# Altium PCB 606-100835.pcbdoc (part 1 of 3)
Units mm, origin at the board's own origin, x right, y up, seen from the top; angles counter-clockwise.
Board outline 27 x 28.35 mm, 6 copper layers (Layer 1, Layer 2, Layer 3, Layer 4, Layer 5, Layer 6), stack 1.518 mm thick; 145 components, 197 nets, 755 pads, 438 vias.
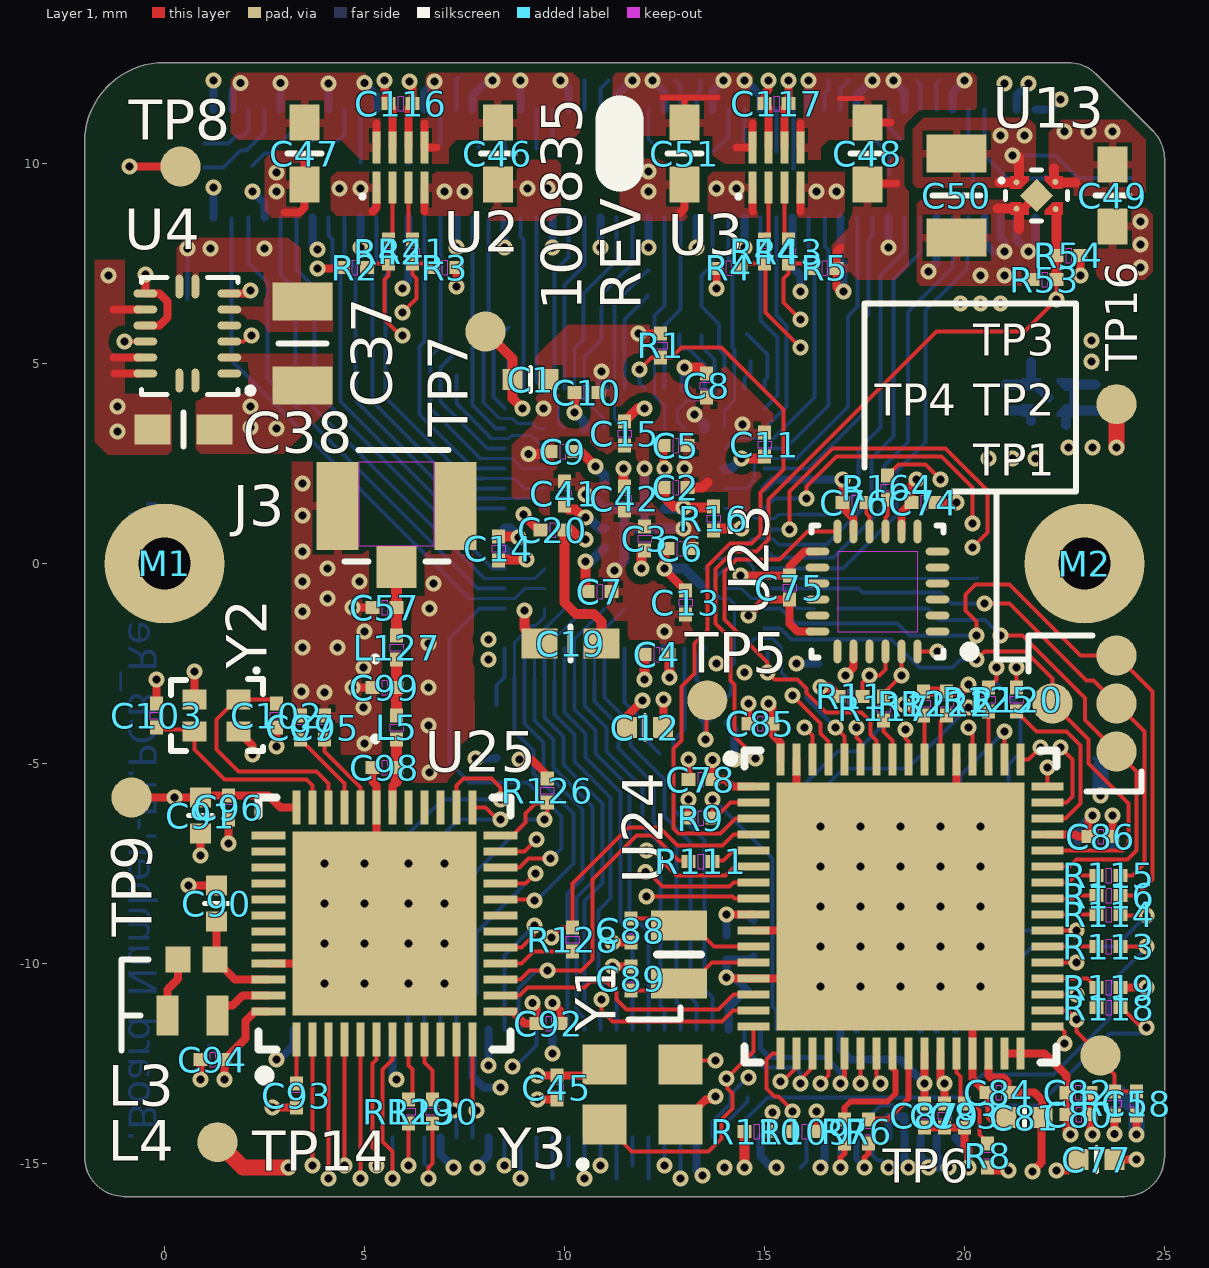
[diagram p0: Layer 1 view]
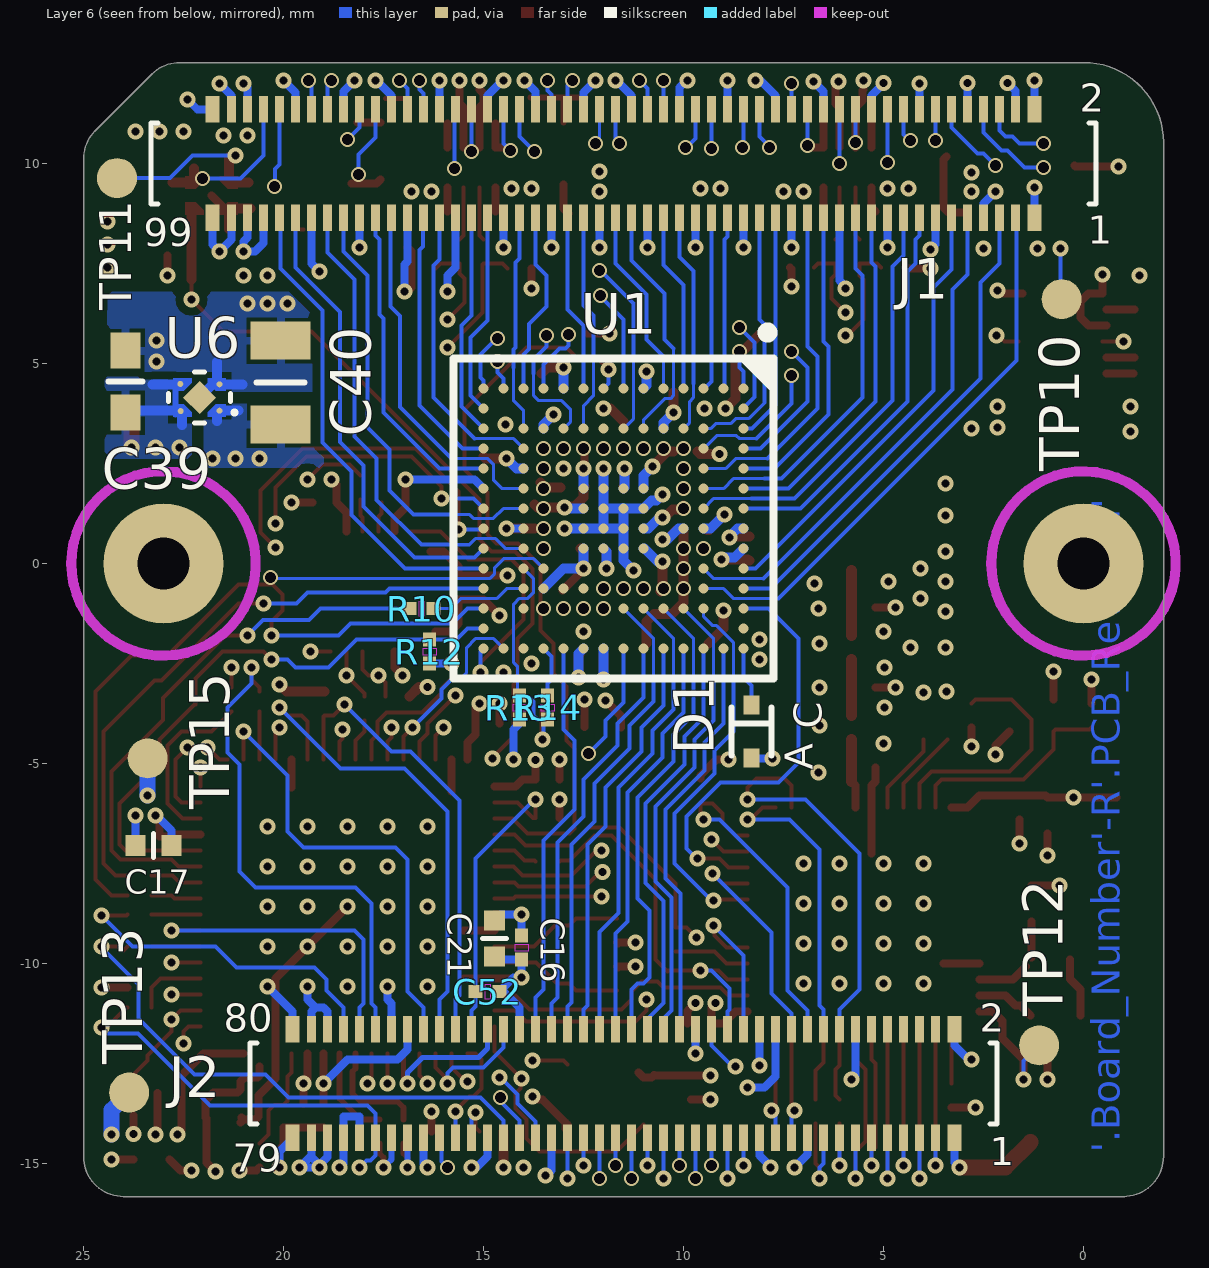
[diagram p1: Layer 6 view, seen from below]
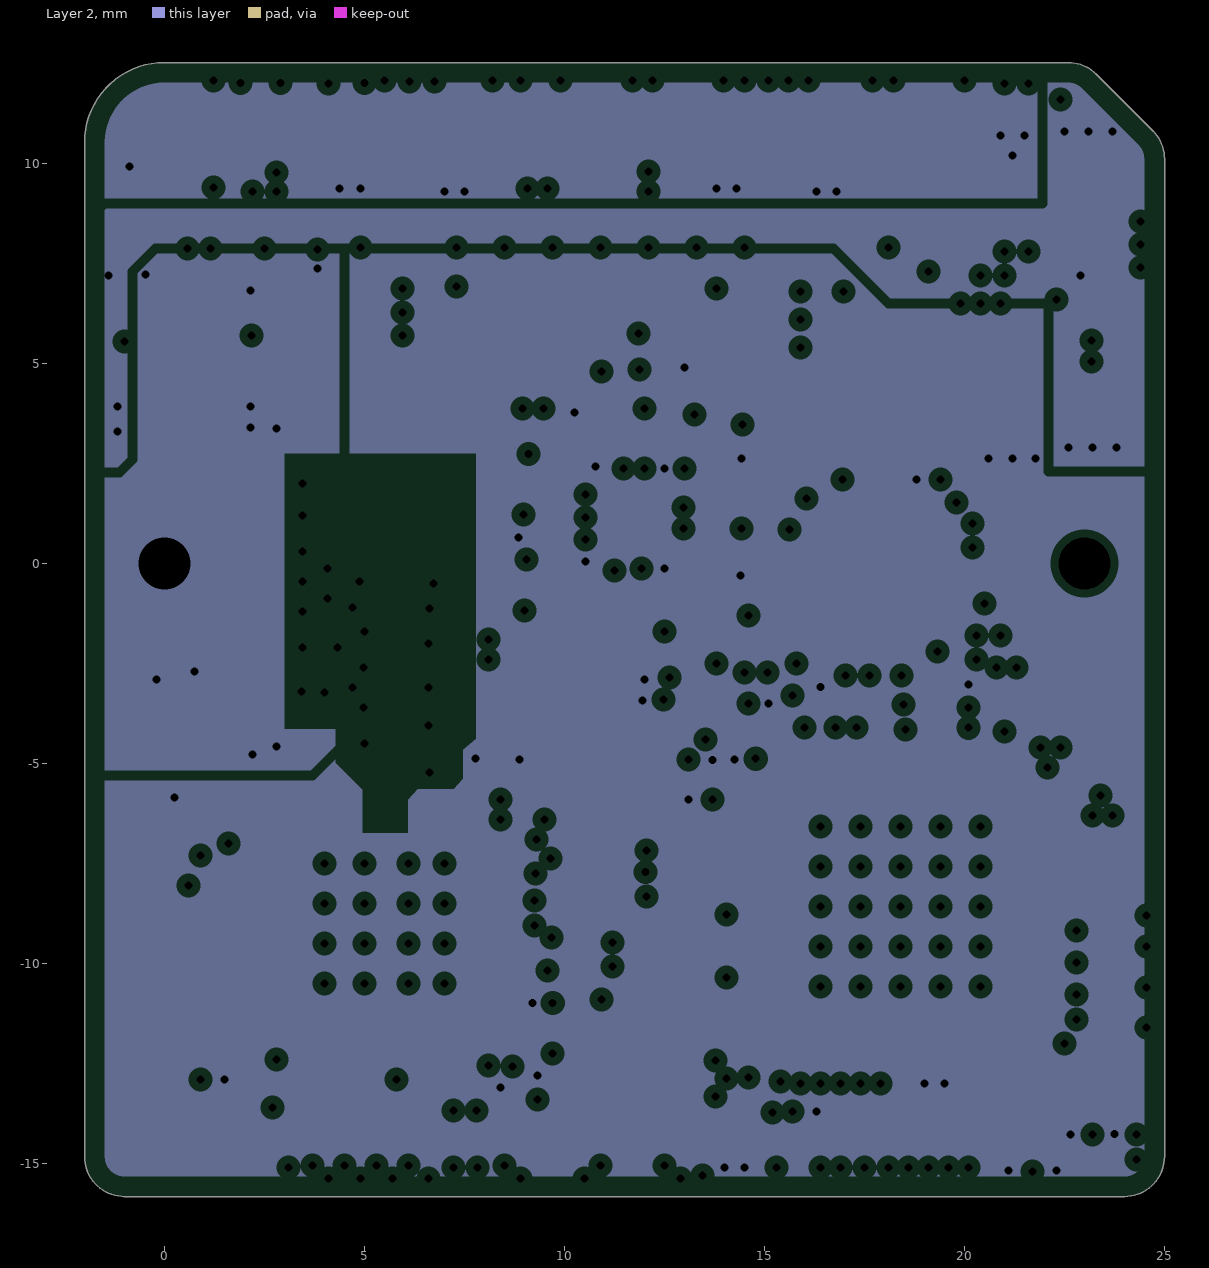
[diagram p2: Layer 2, clearances drawn from the general rule]
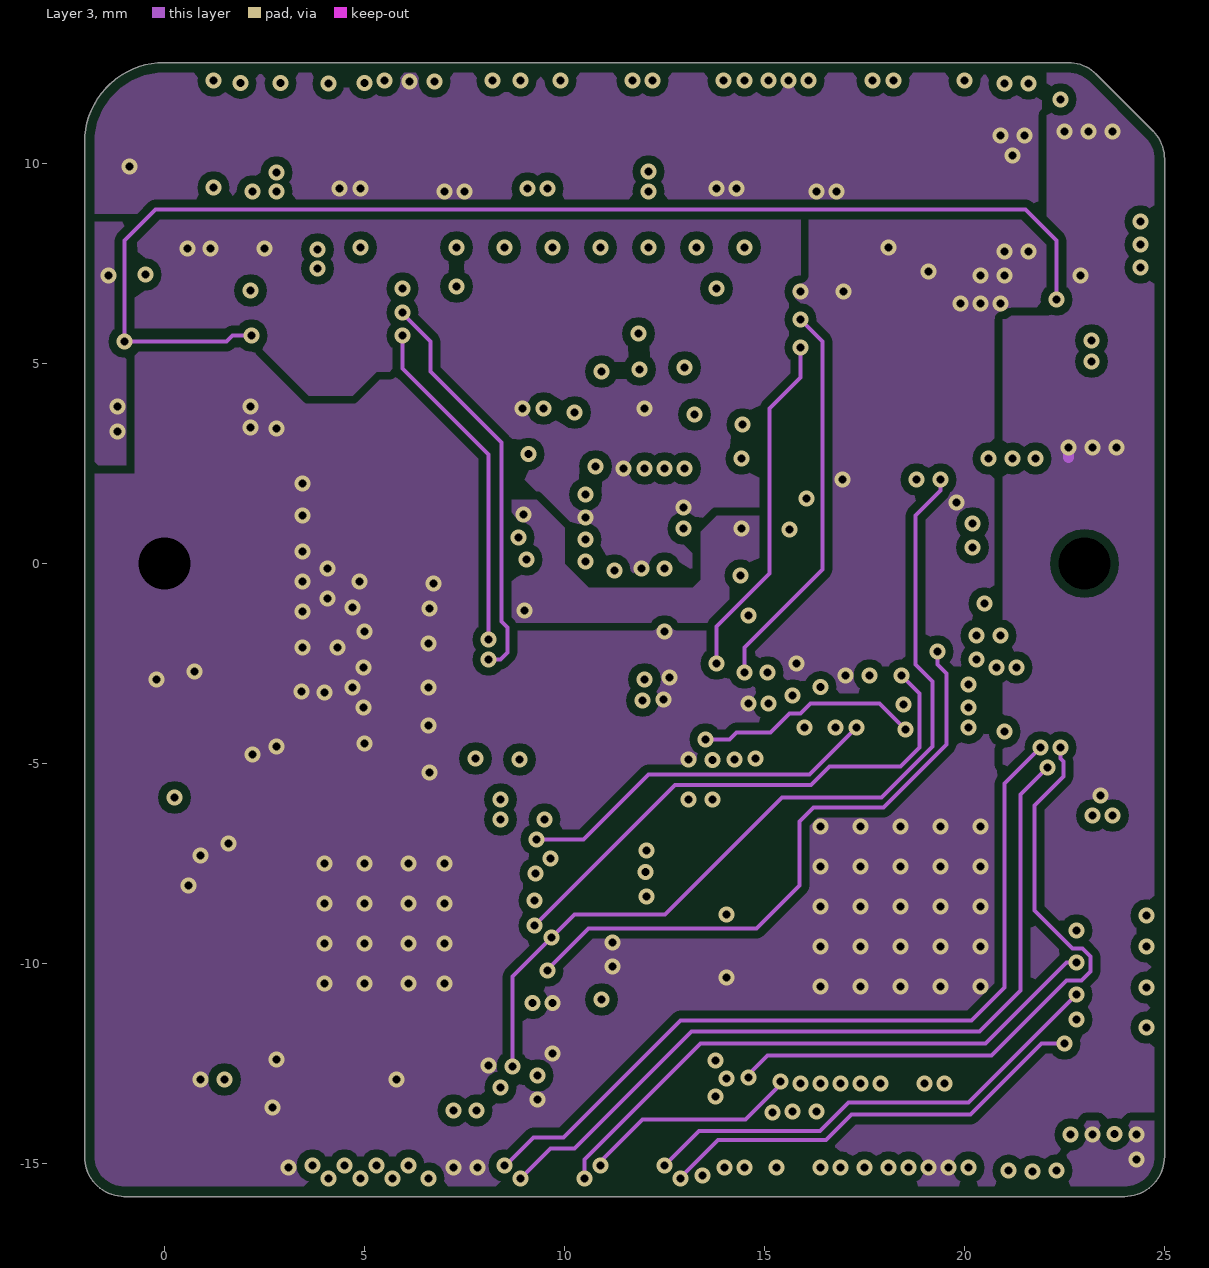
[diagram p3: Layer 3]
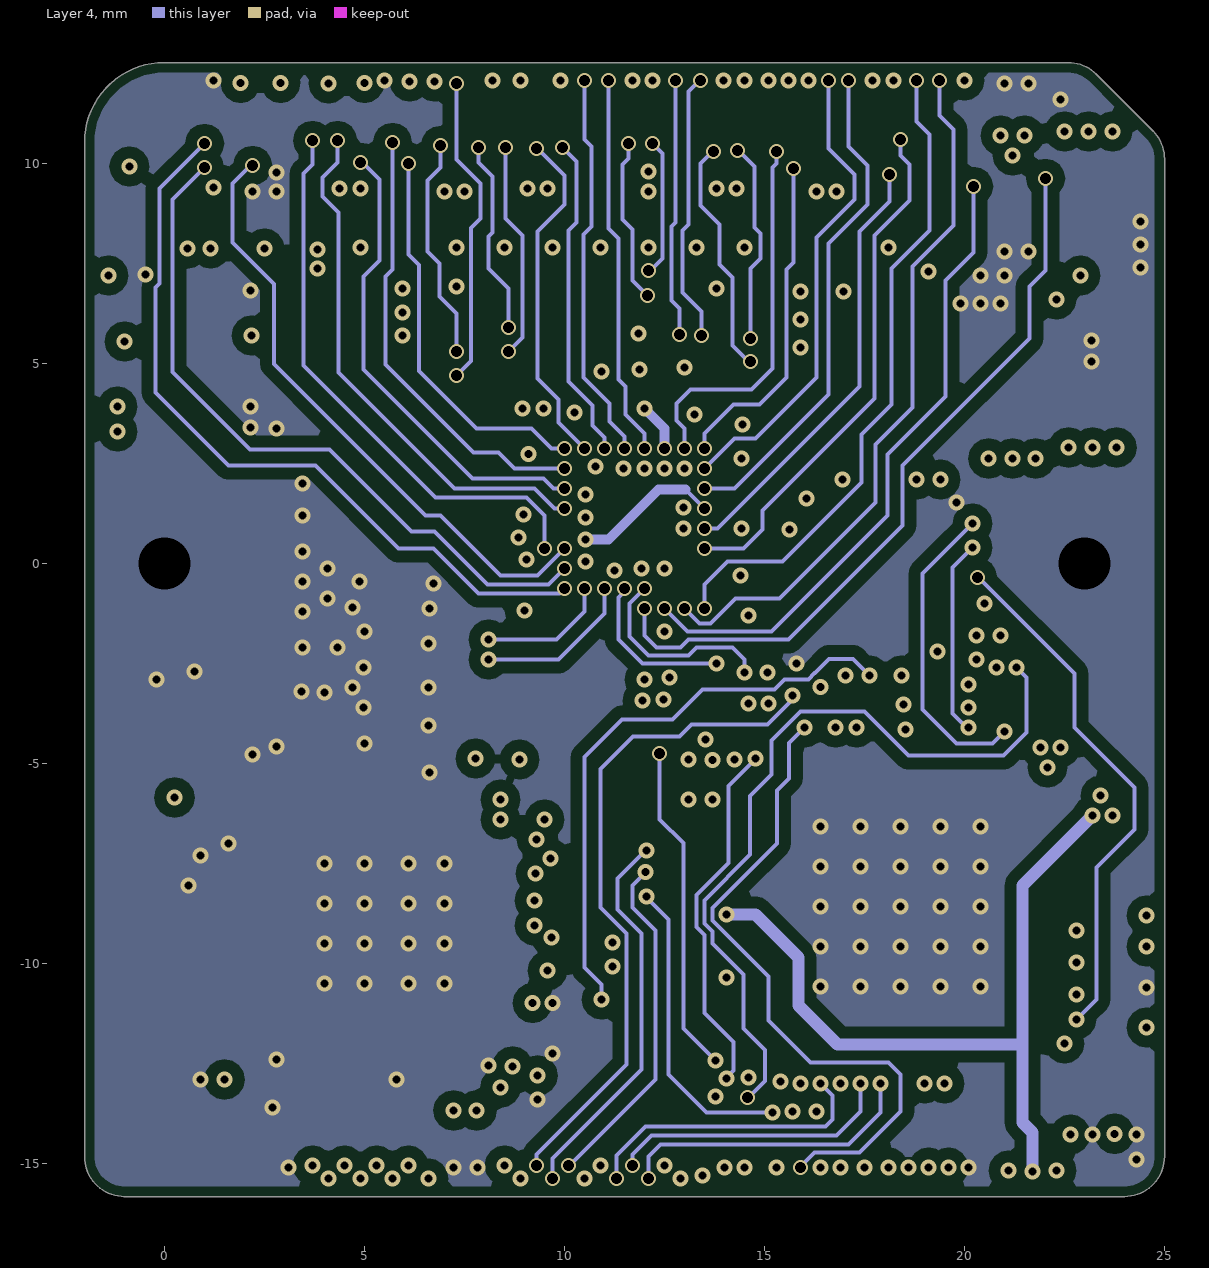
[diagram p4: Layer 4]
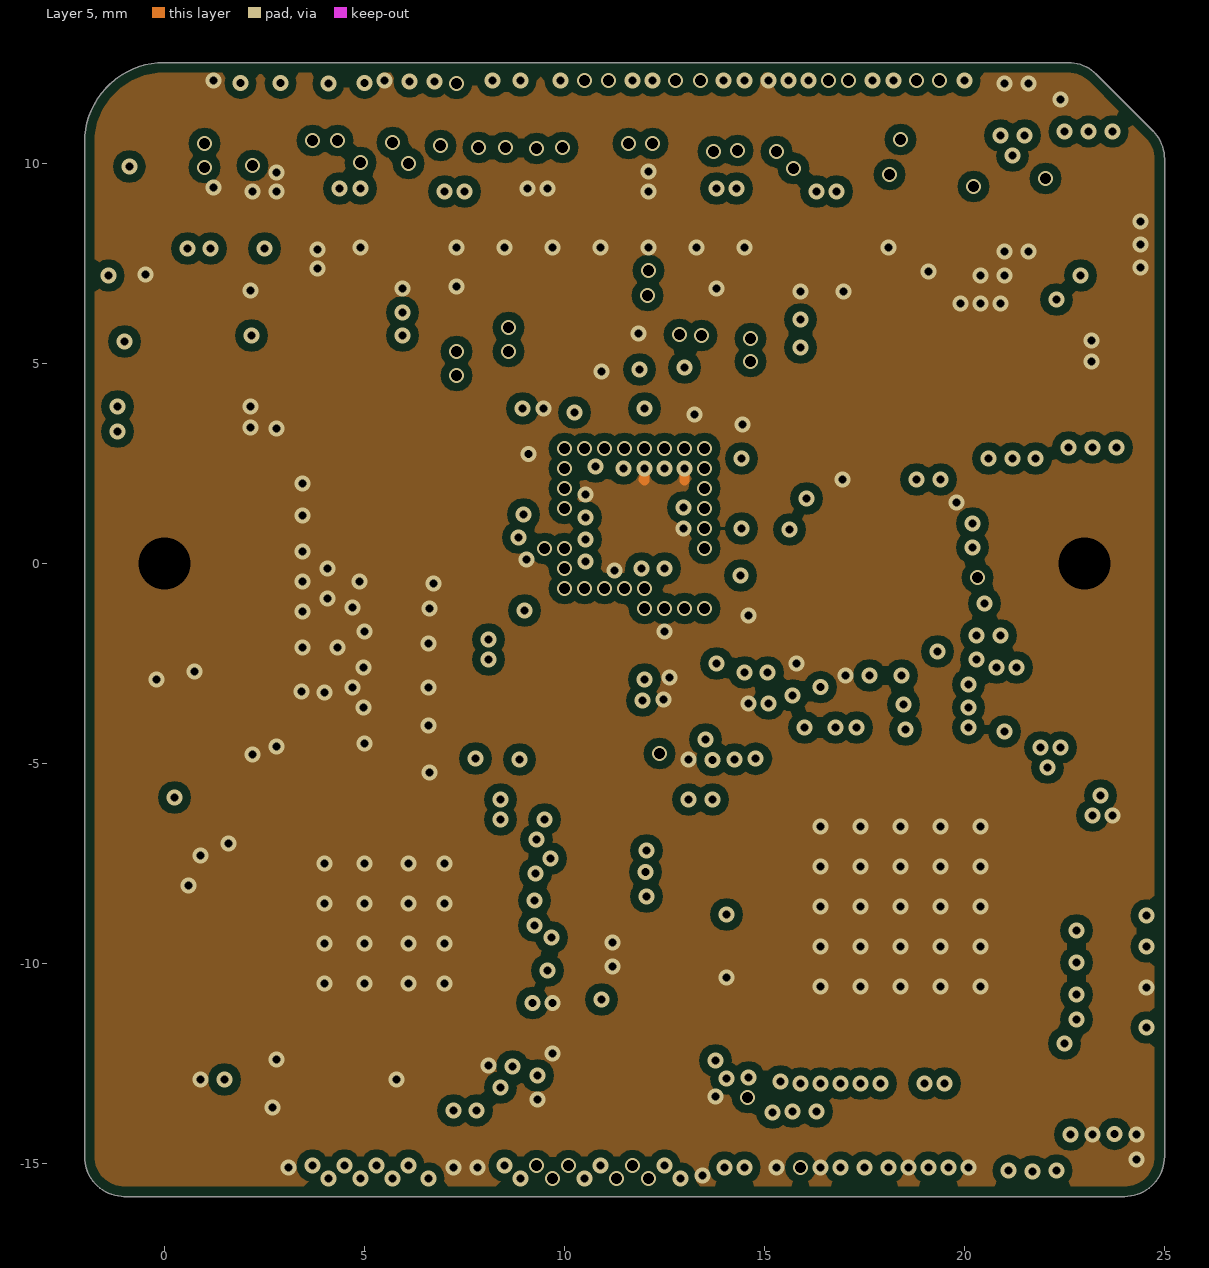
[diagram p5: Layer 5]

## Layer stack, top to bottom
Top Solder: solder mask 0.0178, Solder Resist, Dk 3.5
Layer 1: signal copper 0.0444
Dielectric 1: prepreg 0.0723, Dk 4.2
Layer 2: plane copper 0.0152, net (Multiple Nets)
Dielectric 2: core 0.1016, Dk 4.2
Layer 3: signal copper 0.0152
Dielectric 3: core 1.0205, Dk 4.2
Layer 4: signal copper 0.0152
Dielectric 4: core 0.1016, Dk 4.2
Layer 5: signal copper 0.0152
Dielectric 5: core 0.0716, Dk 4.2
Layer 6: signal copper 0.0444
Bottom Solder: solder mask 0.0178, Solder Resist, Dk 3.5

## Board outline
-2,-14.825 ccw(c-1,-14.825) -1,-15.825 -1.025,-15.825 24,-15.825 ccw(c24,-14.825) 25,-14.825 25,10.111 ccw(c24,10.111) 24.707,10.818 23.293,12.232 ccw(c22.586,11.525) 22.586,12.525 22.611,12.525 0,12.525 ccw(c0,10.525) -2,10.525 -2,10.5

## Design rules (kind name [scope] priority, off if disabled: settings)
AssemblyTestPointUsage [All] p1 off:
AssemblyTestpoint [All] p1 off: testpointundercomponent=TRUE minsize=1.016 maxsize=2.54 preferedsize=1.524 minholesize=0 maxholesize=1.016 preferedholesize=0.813 testpointgrid=0.025 usegrid=TRUE gridtolerance=0 allowsidetop=TRUE allowsidebottom=TRUE
BoardOutlineClearance [NOT IsKeepOut] p1: gap=0.25 except(0: Text-OutlineEdge)
Clearance thieving [InPolygonClass('thieving')] p1: gap=0.3
Clearance thieving_1 [InNet('thieving-temp')] p2: gap=0.3
Clearance U6andU13 [InPadClass('U6andU13Clearance') vs IsRegion or InPoly] p3: gap=0.094
Clearance BGA_SPACING [TouchesRoom('clearance_bga') vs OnLayer('Layer 6')] p4: gap=0.083 except(0.05: SMDPad-Region)
Clearance "keepout shapes" [IsKeepOut] p5: gap=0
Clearance [All] p6: gap=0.1 except(0.2: Arc-Poly Track-Poly SMDPad-Poly THPad-Poly Via-Poly Fill-Poly Poly-Poly)
ComponentClearance [All] p1 off: gap=0.2 collisioncheckmode=3 verticalgap=0.127 showdistances=TRUE
DiffPairsRouting [InDifferentialPairClass('90OHMS_DIFF')] p1: maxlimit=0.152 minlimit=0.152 mostfreqgap=0.152 toplayer_minwidth=0.146 toplayer_maxwidth=0.146 toplayer_prefwidth=0.146 midlayer1_minwidth=0.146 midlayer1_maxwidth=0.146 midlayer1_prefwidth=0.146 midlayer3_minwidth=0.146 midlayer3_maxwidth=0.146 midlayer3_prefwidth=0.146 midlayer4_minwidth=0.146 midlayer4_maxwidth=0.146 midlayer4_prefwidth=0.146 bottomlayer_minwidth=0.146 bottomlayer_maxwidth=0.146 bottomlayer_prefwidth=0.146 maxuncoupledlength=12.7
FabricationTestPointUsage [All] p1 off: valid=0 allowmultiple=FALSE
FabricationTestpoint [All] p1 off: side=3 testpointundercomponent=TRUE minsize=1.016 maxsize=2.54 preferedsize=1.524 minholesize=0 maxholesize=1.016 preferedholesize=0.813 testpointgrid=0.025 allowsidetop=TRUE allowsidebottom=TRUE usegrid=TRUE gridtolerance=0
HoleSize [All] p1: absolutevalues=TRUE maxlimit=6 minlimit=0.025 maxpercent=80.000 minpercent=20.000
HoleToHoleClearance HoleToHoleClearance_1 [InDrillLayerPair('Layer 5 - Layer 4') vs InDrillLayerPair('Layer 5 - Layer 6')] p1: gap=0 allowstackedmicrovias=TRUE
HoleToHoleClearance [All] p2: gap=0.2 allowstackedmicrovias=TRUE
MinimumSolderMaskSliver [All] p1: minsoldermaskwidth=0.005
PlaneClearance [All] p1: clearance=0.203
PlaneConnect [All] p1: planeconnectstyle=Direct reliefexpansion=0.508 reliefentries=4 reliefconductorwidth=0.254 reliefairgap=0.254
PolygonConnect notherm [InPolygonClass('Notherm')] p1: connectstyle=Direct reliefconductorwidth=0.254 reliefentries=4 polygonreliefangle="90 Angle" airgapwidth=0.254
PolygonConnect PolygonConnect_Flood [OnMid vs InNet('GND')] p2: connectstyle=Direct reliefconductorwidth=0.254 reliefentries=4 polygonreliefangle="90 Angle" airgapwidth=0.254
PolygonConnect Viaconnect [isvia vs ispolygon] p3: connectstyle=Direct reliefconductorwidth=0.254 reliefentries=4 polygonreliefangle="90 Angle" airgapwidth=0.254
PolygonConnect [All] p4: connectstyle=Relief reliefconductorwidth=0.2 reliefentries=4 polygonreliefangle="90 Angle" airgapwidth=0.1
RoomDefinition clearance_bga [HasFootprint('LATC-csBGA-132')] p1: confinementstyle=ConfineIn formatcopy=TRUE lockcomponents=FALSE outline 5.9,6.9 17.1,6.9 17.1,-4.5 5.9,-4.5
RoomDefinition U_SouthSide [InComponentClass('U_SouthSide')] p2: confinementstyle=ConfineIn formatcopy=TRUE lockcomponents=FALSE outline 0.792,-15.556 0.792,-10.629 23.131,-10.629 23.131,-15.556
RoomDefinition U_RADIO [InComponentClass('U_RADIO')] p3: confinementstyle=ConfineIn formatcopy=TRUE lockcomponents=FALSE outline -0.953,-14.495 10.672,-14.495 10.672,3.305 -0.953,3.305
RoomDefinition U_PowerCore [InComponentClass('U_PowerCore')] p4: confinementstyle=ConfineIn formatcopy=TRUE lockcomponents=FALSE outline -1.878,-1.87 24.872,-1.87 24.872,11.03 -1.878,11.03
RoomDefinition U_NorthSide [InComponentClass('U_NorthSide')] p5: confinementstyle=ConfineIn formatcopy=TRUE lockcomponents=FALSE outline -1.683,7.444 -1.683,12.355 26.306,12.355 26.306,7.444
RoomDefinition U_MCU_IMU [InComponentClass('U_MCU_IMU')] p6: confinementstyle=ConfineIn formatcopy=TRUE lockcomponents=FALSE outline 11.172,-15.595 24.397,-15.595 24.397,6.23 11.172,6.23
RoomDefinition U_FPGA_Power [InComponentClass('U_FPGA_Power')] p7: confinementstyle=ConfineIn formatcopy=TRUE lockcomponents=FALSE outline 6.222,-5.52 15.472,-5.52 15.472,5.23 6.222,5.23
RoomDefinition U_FPGA_IO [InComponentClass('U_FPGA_IO')] p8: confinementstyle=ConfineIn formatcopy=TRUE lockcomponents=FALSE outline 2.647,-15.625 24.772,-15.625 24.772,11.98 2.647,11.98
RoutingVias MicroVias [(StartLayer ='Layer 4') and (stopLayer='Layer 6' )] p1: holewidth=0.279 width=0.381 viastyle="Through Hole" minholewidth=0.279 minwidth=0.381 maxholewidth=0.279 maxwidth=0.381 useviatemplates=TRUE viatemplateguid#1={BAE8E7A9-EEE1-499E-BC9C-5D935B84C81D} viatemplatename#1=v38h28mx0
RoutingVias THVias [((StartLayer ='Layer 1') and (stopLayer='Layer 6' ))] p2: holewidth=0.2 width=0.4 viastyle="Through Hole" minholewidth=0.2 minwidth=0.4 maxholewidth=0.2 maxwidth=0.4
SilkToSilkClearance [All] p1: silktosilkclearance=0.017
SilkToSolderMaskClearance [IsPad] p1: minsilkscreentomaskgap=0.1 clearancetoexposedcopper=TRUE
SolderMaskExpansion [All] p1: expansion=0.05
Width Width_PWR_GND [InNetClass('PWR_GND')] p1: maxlimit=0.4 minlimit=0.1 preferedwidth=0.2
Width Width_1 [All] p2: maxlimit=0.35 minlimit=0.083 preferedwidth=0.2 toplayer_minwidth=0.1 toplayer_prefwidth=0.1 midlayer1_minwidth=0.1 midlayer1_maxwidth=0.3 midlayer1_prefwidth=0.1 midlayer3_minwidth=0.1 midlayer3_maxwidth=0.3 midlayer4_minwidth=0.1 midlayer4_maxwidth=0.3 midlayer4_prefwidth=0.1 bottomlayer_prefwidth=0.1 minimp=50.000000 maximp=50.000000 favimp=50.000000
17 further rules are at their usual default settings.

## Classes and differential pairs
pad class U6andU13Clearance: U6-5 U13-5
net class BGA: FPGA_CDONE FPGA_CRESET FPGA_DATA_RDY FPGA_GPIO_1 FPGA_GPIO_2 FPGA_GPIO_3 FPGA_GPIO_4 FPGA_GPIO_5 FPGA_GPIO_6 FPGA_GPIO_7 FPGA_GPIO_8 FPGA_GPIO_9 FPGA_GPIO_10 FPGA_JTAGEN FPGA_MCLK FPGA_MCU_1 FPGA_MCU_2 FPGA_MCU_3 FPGA_MISO FPGA_MOSI FPGA_NCS FPGA_NRST FPGA_SCLK FPGA_SDO FPGA_TCK FPGA_TDI FPGA_TDO FPGA_TMS NRF_FPGA_GPIO_1 NRF_FPGA_GPIO_2 SENSOR_A1 SENSOR_A2 SENSOR_A3 SENSOR_A4 SENSOR_A5 SENSOR_A6 SENSOR_A7 SENSOR_A8 SENSOR_A9 SENSOR_A10 SENSOR_A11 SENSOR_A12 SENSOR_A13 SENSOR_A14 SENSOR_A15 SENSOR_A16 SENSOR_A17 SENSOR_A18 SENSOR_A19 SENSOR_A20 SENSOR_A21 SENSOR_A22 SENSOR_A23 SENSOR_A24 SENSOR_A25 SENSOR_A26 SENSOR_A27 SENSOR_A28 SENSOR_A29 SENSOR_A30 SENSOR_A31 SENSOR_A32 SENSOR_B1 SENSOR_B2 SENSOR_B3 SENSOR_B4 SENSOR_B5 SENSOR_B6 SENSOR_B7 SENSOR_B8 SENSOR_B9 SENSOR_B10 SENSOR_B11 SENSOR_B12 SENSOR_B13 SENSOR_B14 SENSOR_B15 SENSOR_B16 SENSOR_B17 SENSOR_B18 SENSOR_B19 SENSOR_B20 SENSOR_B21 SENSOR_B22 SENSOR_B23 SENSOR_B24 SENSOR_B25 SENSOR_B26 SENSOR_B27 SENSOR_B28 SENSOR_B29 SENSOR_B30 SENSOR_B31 SENSOR_B32
polygon class Notherm: u4_1v2_notherm u4_3v6_notherm u4_gnd_notherm
differential pair class 90OHMS_DIFF: MCU_USB_D USB_D
component class U_FPGA_Power: C1 C2 C3 C4 C5 C6 C7 C8 C9 C10 C11 C12 C13 C14 C15 C19 C20 C41 C42 D1 R16
component class U_FPGA_IO: C18 C45 C46 C47 C48 C51 C116 C117 R2 R3 R4 R5 R10 R12 R13 R15 R41 R42 R43 R44 TP1 TP2 TP3 TP4 TP5 TP6 U1 U2 U3 Y3
component class U_MCU_IMU: C16 C17 C21 C52 C74 C75 C76 C77 C78 C79 C80 C81 C82 C83 C84 C85 C86 C87 C88 C89 R1 R6 R7 R8 R9 R11 R14 R109 R110 R111 R112 R113 R114 R115 R116 R117 R118 R119 R120 R122 R125 R164 U23 U24 Y1
component class U_NorthSide: J1
component class U_PowerCore: C37 C38 C39 C40 C49 C50 M1 M2 R53 R54 TP7 TP8 TP9 TP10 TP11 TP12 TP13 TP14 TP15 TP16 U4 U6 U13
component class U_RADIO: C57 C90 C91 C92 C93 C94 C95 C96 C97 C98 C99 C102 C103 J3 L3 L4 L5 L127 R126 R128 R129 R130 U25 Y2
component class U_SouthSide: J2
net class SENSOR_A[1..32]: SENSOR_A1 SENSOR_A2 SENSOR_A3 SENSOR_A4 SENSOR_A5 SENSOR_A6 SENSOR_A7 SENSOR_A8 SENSOR_A9 SENSOR_A10 SENSOR_A11 SENSOR_A12 SENSOR_A13 SENSOR_A14 SENSOR_A15 SENSOR_A16 SENSOR_A17 SENSOR_A18 SENSOR_A19 SENSOR_A20 SENSOR_A21 SENSOR_A22 SENSOR_A23 SENSOR_A24 SENSOR_A25 SENSOR_A26 SENSOR_A27 SENSOR_A28 SENSOR_A29 SENSOR_A30 SENSOR_A31 SENSOR_A32
net class SENSOR_B[1..32]: SENSOR_B1 SENSOR_B2 SENSOR_B3 SENSOR_B4 SENSOR_B5 SENSOR_B6 SENSOR_B7 SENSOR_B8 SENSOR_B9 SENSOR_B10 SENSOR_B11 SENSOR_B12 SENSOR_B13 SENSOR_B14 SENSOR_B15 SENSOR_B16 SENSOR_B17 SENSOR_B18 SENSOR_B19 SENSOR_B20 SENSOR_B21 SENSOR_B22 SENSOR_B23 SENSOR_B24 SENSOR_B25 SENSOR_B26 SENSOR_B27 SENSOR_B28 SENSOR_B29 SENSOR_B30 SENSOR_B31 SENSOR_B32
net class SENSOR_VCC[1..4]: SENSOR_VCC1 SENSOR_VCC2 SENSOR_VCC3 SENSOR_VCC4
net class PWR_GND: GND VCC_1V2 VCC_3V3_CORE VCC_3V3_SENSORS VCC_3V6 VCC_PLL
polygon class thieving: thievingL5
differential pair USB_D: +USB_D_P -USB_D_N
differential pair USB_MCU_D: +USB_MCU_D_P -USB_MCU_D_N

## Components (designator, comment, footprint, x,y, rotation, side; value= is the part's Value field where it differs from the comment)
C1 "4.7uF" 0402-IPCsm_55 9.15,4.6 r180 top
C2 "0.1uF" 0201-ipcsm_33 12.775,1.9 r0 top
C3 "0.1uF" 0201-ipcsm_33 12,0.625 r90 top
C4 "0.1uF" 0201-ipcsm_33 12.3,-2.275 r0 top
C5 "0.1uF" 0201-ipcsm_33 12.775,2.95 r0 top
C6 "0.1uF" 0201-ipcsm_33 12.875,0.375 r0 top
C7 "0.1uF" 0201-ipcsm_33 10.875,-0.7 r0 top
C8 "0.1uF" 0201-ipcsm_33 13.55,4.45 r270 top
C9 "0.1uF" 0201-ipcsm_33 9.95,2.8 r180 top
C10 "0.1uF" 0201-ipcsm_33 10.55,4.275 r0 top
C11 "0.1uF" 0201-ipcsm_33 15,2.975 r90 top
C12 "4.7uF" 0402-IPCsm_55 12.015,-4.1 r180 top
C13 "0.1uF" 0201-ipcsm_33 13.025,-0.975 r270 top
C14 "0.1uF" 0201-ipcsm_33 8.35,0.375 r270 top
C15 "0.1uF" 0201-ipcsm_33 11.5,3.25 r270 top
C16 "0.1uF" 0201-IPCsm_33 14.05,-9.6 r270 bottom
C17 "4.7uF" 0402-IPCsm_55 23.25,-7.05 r180 bottom
C18 "0.1uF" 0201-IPCsm_33 24.3,-13.5 r270 top
C19 "10uF" 0603-IPCsm_90 10.15,-2 r180 top
C20 "0.1uF" 0201-IPCsm_33 9.7,0.837 r0 top
C21 "4.7uF" 0402-IPCsm_55 14.725,-9.375 r90 bottom
C37 "47uF" 0805-ipcsm_145 3.45,5.5 r270 top
C38 "10uF" 0603-IPCsm_90 0.475,3.35 r180 top
C39 "10uF" 0603-IPCsm_90 23.95,4.55 r270 bottom
C40 "47uF" 0805-ipcsm_145 20.075,4.525 r90 bottom
C41 "0.1uF" 0201-ipcsm_33 10,1.75 r90 top
C42 "0.1uF" 0201-ipcsm_33 11.5,1.625 r270 top
C45 "0.1uF" 0201-ipcsm_33 9.811,-13.1 r270 top
C46 "10uF" 0603-IPCsm_90 8.331,10.25 r90 top
C47 "10uF" 0603-IPCsm_90 3.5,10.25 r90 top
C48 "10uF" 0603-IPCsm_90 17.575,10.25 r90 top
C49 "10uF" 0603-IPCsm_90 23.7,9.2 r90 top
C50 "47uF" 0805-ipcsm_145 19.8,9.2 r270 top
C51 "10uF" 0603-IPCsm_90 13,10.25 r90 top
C52 "0.1uF" 0201-IPCsm_33 14.9,-10.7 r180 bottom
C57 "1.2pF" 0201-IPCsm_33 5.5,-1.1 r180 top
C74 "0.1uF" 0201-ipcsm_33 18.975,1.525 r180 top
C75 "0.1uF" 0201-ipcsm_33 15.625,-0.601 r90 top
C76 "0.1uF" 0201-ipcsm_33 17.25,1.525 r180 top
C77 "4.7uF" 0402-IPCsm_55 23.3,-14.9 r0 top
C78 "0.1uF" 0201-ipcsm_33 13.4,-5.4 r0 top
C79 "0.1uF" 0201-ipcsm_33 19.5,-13.8 r90 top
C80 "0.1uF" 0201-ipcsm_33 22.85,-13.775 r180 top
C81 "4.7uF" 0402-IPCsm_55 21.5,-13.85 r180 top
C82 "0.1uF" 0201-ipcsm_33 22.85,-13.231 r180 top
C83 "0.1uF" 0201-ipcsm_33 20,-13.8 r270 top
C84 "0.1uF" 0201-ipcsm_33 20.85,-13.225 r180 top
C85 "0.1uF" 0201-ipcsm_33 14.899,-4.005 r0 top
C86 "0.1uF" 0201-ipcsm_33 23.4,-6.825 r0 top
C87 "0.1uF" 0201-ipcsm_33 19,-13.8 r90 top
C88 "15pF" 0201-IPCsm_33 11.659,-9.175 r270 top
C89 "15pF" 0201-IPCsm_33 11.659,-10.375 r90 top
C90 "1uF" 0402-IPCsm_55 1.3,-8.5 r90 top
C91 "4.7uF" 0402-IPCsm_55 0.9,-6.3 r270 top
C92 "0.1uF" 0201-ipcsm_33 9.6,-11.5 r180 top
C93 "0.1uF" 0201-ipcsm_33 3.3,-13.3 r270 top
C94 "0.1uF" 0201-ipcsm_33 1.2,-12.4 r0 top
C95 "0.1uF" 0201-ipcsm_33 4,-4.1 r90 top
C96 "0.1uF" 0201-ipcsm_33 1.6,-6.1 r90 top
C97 "100pF" 0201-IPCsm_33 3.4,-4.1 r90 top
C98 ".8pF" 0201-IPCsm_33 5.5,-5.1 r180 top
C99 ".8pF" 0201-IPCsm_33 5.5,-3.1 r180 top
C102 "12pF" 0201-IPCsm_33 2.8,-3.8 r270 top
C103 "12pF" 0201-IPCsm_33 -0.2,-3.8 r90 top
C116 "0.1uF" 0201-ipcsm_33 5.9,11.5 r180 top
C117 "0.1uF" 0201-ipcsm_33 15.3,11.5 r180 top
D1 "RB520S30T1G" SOD523 8.3,-4.2 r90 bottom
J1 "DF40C-100DP-0.4(51)" con100_hirose-df40c-100dp_129h 11.5,10 r0 bottom locked
J2 "DF40C-80DP-0.4(51)" con80_hirose-df40c-80dp_129h 11.5,-13 r0 bottom locked
J3 "U_FL" con_hrs_U_FL-SMT 5.8,0.675 r180 top
L3 "15nH" IND_0402-36_LQP15M 0.8,-9.9 r0 top
L4 "10uH" IND-0603_32H 0.7,-11.3 r180 top
L5 "3.9nH" 0201-IPCsm_33 5.8,-4.1 r90 top
L127 "1.8nH" 0201-IPCsm_33 5.8,-2.1 r90 top
M1 "MTGC300H130P" MTGC300H130P 0,0 r0 top locked
M2 "MTGC300H130P" MTGC300H130P 23,0 r0 top locked
R1 "10k" 0201-IPCsm_26 12.4,5.45 r90 top
R2 "10k" 0201-IPCsm_26 4.757,7.4 r180 top
R3 "10k" 0201-IPCsm_26 7,7.4 r0 top
R4 "10k" 0201-IPCsm_26 14.1,7.375 r180 top
R5 "10k" 0201-IPCsm_26 16.5,7.375 r0 top
R6 "37.4" 0201-IPCsm_26 17.6,-14.2 r270 top
R7 "37.4" 0201-IPCsm_26 17,-14.2 r270 top
R8 "0.0" 0201-IPCsm_26 20.575,-14.8 r90 top
R9 "10k" 0201-IPCsm_26 13.4,-6.365 r0 top
R10 "33" 0201-IPCsm_26 16.55,-1.125 r180 bottom
R11 "10k" 0201-IPCsm_26 17.15,-3.325 r0 top
R12 "10k" 0201-IPCsm_26 16.35,-2.2 r270 bottom
R13 "1k" 0201-IPCsm_26 14.1,-3.6 r90 bottom
R14 "0.0" 0201-IPCsm_26 13.4,-3.6 r270 bottom
R15 "10k" 0201-IPCsm_26 23.75,-13.5 r90 top
R16 "100" 0201-IPCsm_26 13.725,1.125 r270 top
R41 "17.8k" 0201-IPCsm_26 6.2,7.8 r90 top
R42 "17.8k" 0201-IPCsm_26 5.6,7.8 r90 top
R43 "17.8k" 0201-IPCsm_26 15.6,7.8 r90 top
R44 "17.8k" 0201-IPCsm_26 15,7.8 r90 top
R53 "4.7K" 0201-IPCsm_26 22,7.1 r180 top
R54 "4.7K" 0201-IPCsm_26 22.6,7.7 r180 top
R109 "10k" 0201-IPCsm_26 16,-14.2 r180 top
R110 "10k" 0201-IPCsm_26 14.8,-14.2 r0 top
R111 "33" 0201-IPCsm_26 13.4,-7.45 r180 top
R112 "10k" 0201-IPCsm_26 19.55,-3.5 r270 top
R113 "33" 0201-IPCsm_26 23.6,-9.575 r180 top
R114 "33" 0201-IPCsm_26 23.6,-8.775 r180 top
R115 "33" 0201-IPCsm_26 23.6,-7.8 r0 top
R116 "33" 0201-IPCsm_26 23.6,-8.3 r0 top
R117 "33" 0201-IPCsm_26 17.975,-3.625 r270 top
R118 "27K" 0201-IPCsm_26 23.6,-11.1 r0 top
R119 "47k" 0201-IPCsm_26 23.6,-10.6 r0 top
R120 "33" 0201-IPCsm_26 21.3,-3.4 r270 top
R122 "10k" 0201-IPCsm_26 18.975,-3.5 r270 top
R125 "33" 0201-IPCsm_26 20.6,-3.4 r90 top
R126 "10k" 0201-IPCsm_26 9.569,-5.675 r270 top
R128 "33" 0201-IPCsm_26 10.2,-9.4 r270 top
R129 "33" 0201-IPCsm_26 6.1,-13.7 r90 top
R130 "33" 0201-IPCsm_26 6.7,-13.7 r90 top
R164 "33" 0201-IPCsm_26 18.075,1.9 r270 top
TP1 "tp-1mm" TP-S100_SMT 23.8,-4.7 r90 top
TP2 "tp-1mm" TP-S100_SMT 23.8,-3.5 r90 top
TP3 "tp-1mm" TP-S100_SMT 23.8,-2.3 r90 top
TP4 "tp-1mm" TP-S100_SMT 22.2,-3.5 r90 top
TP5 "tp-1mm" TP-S100_SMT 13.569,-3.421 r90 top
TP6 "tp-1mm" TP-S100_SMT 23.4,-12.3 r90 top
TP7 "tp-1mm" TP-S100_SMT 8.025,5.8 r90 top
TP8 "tp-1mm" TP-S100_SMT 0.4,9.925 r90 top
TP9 "tp-1mm" TP-S100_SMT -0.825,-5.85 r90 top
TP10 "tp-1mm" TP-S100_SMT 0.544,6.608 r90 bottom
TP11 "tp-1mm" TP-S100_SMT 24.162,9.635 r90 bottom
TP12 "tp-1mm" TP-S100_SMT 1.107,-12.046 r90 bottom
TP13 "tp-1mm" TP-S100_SMT 23.857,-13.225 r90 bottom
TP14 "tp-1mm" TP-S100_SMT 1.324,-14.466 r90 top
TP15 "tp-1mm" TP-S100_SMT 23.395,-4.871 r90 bottom
TP16 "tp-1mm" TP-S100_SMT 23.799,3.985 r90 top
U1 "ICE40HX8K-CB132" LATC-csBGA-132 11.75,1.125 r270 bottom locked
U2 "SLG59M1599V" STDFN8_SLG59M1599V 5.9,9.9 r90 top
U3 "SLG59M1599V" STDFN8_SLG59M1599V 15.3,9.9 r90 top
U4 "EP5357LUI" qfn16_ep5357lui 0.57,5.75 r180 top
U6 "TLV70733DQNR1" son4_tlv707dqn 22.1,4.15 r270 bottom
U13 "TLV70733DQNR1" son4_tlv707dqn 21.8,9.2 r90 top
U23 "MPU-6500" QFN24_mpu-6500_3x3 17.825,-0.7 r180 top
U24 "ATSAMG55J19A-MU" qfn64_atsamg55j19a_no_vias 18.4,-8.575 r0 top locked
U25 "nRF52832_QFAA" QFN48_6X6MM_NO_VIAS 5.5,-9 r90 top
Y1 "ABS06-32.768KHZ-9-1-T" xtal_abs06 12.859,-9.775 r270 top
Y2 "32MHz" Xtal_abm12 1.3,-3.8 r180 top
Y3 "48MHz" XTAL_SiT1602_250x200x80 11.956,-13.269 r0 top

## Footprints (in the part's own frame and the unit in brackets; to place one, negate y for a bottom-side part, rotate by r counter-clockwise, add the part's x,y. Pads: shape width x height; smd on the part's side, far side on the other; paste and mask are expansions set on the pad)
0201-IPCsm_26 [mm] "0201-IPCSM_26"
  rect 0.35x0.33 smd mask+0.05: 1(-0.3,0) 2(0.3,0)
  Layer 1 keep-out region: -0.075,0.175 -0.075,-0.175 0.075,-0.175 0.075,0.175
  body extent -0.25,-0.13 0.25,0.13, height 0.26
0201-ipcsm_33 [mm] "0201-IPCSM_33"
  rect 0.35x0.33 smd mask+0.05: 1(-0.3,0) 2(0.3,0)
  Layer 1 keep-out region: -0.075,0.175 -0.075,-0.175 0.075,-0.175 0.075,0.175
  body extent -0.25,-0.13 0.25,0.13, height 0.33
0201-IPCsm_33 [mm] "0201-IPCSM_33"
  rect 0.35x0.33 smd mask+0.05: 1(-0.3,0) 2(0.3,0)
  Layer 1 keep-out region: -0.075,0.175 -0.075,-0.175 0.075,-0.175 0.075,0.175
  body extent -0.25,-0.13 0.25,0.13, height 0.33
0402-IPCsm_55 [mm] "0402-IPCSM_55"
  rect 0.5x0.52 smd mask+0.05: 1(-0.45,0) 2(0.45,0)
  silkscreen extent 0,-0.3 0,0.3, body extent -0.5,-0.2 0.5,0.2, height 0.55
0603-IPCsm_90 [mm] "0603-IPCSM_90"
  rect 0.9x0.75 smd mask+0.05: 1(0.775,0) 2(-0.775,0)
  silkscreen extent 0,-0.42 0,0.42, body extent -0.8,-0.3 0.8,0.3, height 0.9
0805-ipcsm_145 [mm] "0805-IPCSM_145"
  rect 0.95x1.5 smd mask+0.05: 1(-1.05,0) 2(1.05,0)
  silkscreen extent 0,-0.6 0,0.6, body extent -1.1,-0.6 1.1,0.6, height 1.45
con80_hirose-df40c-80dp_129h [mm] "CONN HDR 80POS 0.4MM SMD GOLD"
  rect 0.23x0.66 smd mask+0.1: 1(-7.8,1.355) 2(-7.8,-1.355) 3(-7.4,1.355) 4(-7.4,-1.355) 5(-7,1.355) 6(-7,-1.355) 7(-6.6,1.355) 8(-6.6,-1.355) 9(-6.2,1.355) 10(-6.2,-1.355) 11(-5.8,1.355) 12(-5.8,-1.355) 13(-5.4,1.355) 14(-5.4,-1.355) 15(-5,1.355) 16(-5,-1.355) 17(-4.6,1.355) 18(-4.6,-1.355) 19(-4.2,1.355) 20(-4.2,-1.355) 21(-3.8,1.355) 22(-3.8,-1.355) 23(-3.4,1.355) 24(-3.4,-1.355) 25(-3,1.355) 26(-3,-1.355) 27(-2.6,1.355) 28(-2.6,-1.355) 29(-2.2,1.355) 30(-2.2,-1.355) 31(-1.8,1.355) 32(-1.8,-1.355) 33(-1.4,1.355) 34(-1.4,-1.355) 35(-1,1.355) 36(-1,-1.355) 37(-0.6,1.355) 38(-0.6,-1.355) 39(-0.2,1.355) 40(-0.2,-1.355) 41(0.2,1.355) 42(0.2,-1.355) 43(0.6,1.355) 44(0.6,-1.355) 45(1,1.355) 46(1,-1.355) 47(1.4,1.355) 48(1.4,-1.355) 49(1.8,1.355) 50(1.8,-1.355) 51(2.2,1.355) 52(2.2,-1.355) 53(2.6,1.355) 54(2.6,-1.355) 55(3,1.355) 56(3,-1.355) 57(3.4,1.355) 58(3.4,-1.355) 59(3.8,1.355) 60(3.8,-1.355) 61(4.2,1.355) 62(4.2,-1.355) 63(4.6,1.355) 64(4.6,-1.355) 65(5,1.355) 66(5,-1.355) 67(5.4,1.355) 68(5.4,-1.355) 69(5.8,1.355) 70(5.8,-1.355) 71(6.2,1.355) 72(6.2,-1.355) 73(6.6,1.355) 74(6.6,-1.355) 75(7,1.355) 76(7,-1.355) 77(7.4,1.355) 78(7.4,-1.355) 79(7.8,1.355) 80(7.8,-1.355)
  rect 0.35x0.66 smd mask+0.1: 81(-8.275,1.355) 82(-8.275,-1.355) 83(8.275,1.355) 84(8.275,-1.355)
  silkscreen extent -9.34,-1.02 9.34,1.02, body extent -9.3,-1.02 9.3,1.02, height 1.29
con100_hirose-df40c-100dp_129h [mm] "CONN HDR 100POS 0.4MM SMD GOLD"
  rect 0.23x0.66 smd mask+0.1: 1(-9.8,1.355) 2(-9.8,-1.355) 3(-9.4,1.355) 4(-9.4,-1.355) 5(-9,1.355) 6(-9,-1.355) 7(-8.6,1.355) 8(-8.6,-1.355) 9(-8.2,1.355) 10(-8.2,-1.355) 11(-7.8,1.355) 12(-7.8,-1.355) 13(-7.4,1.355) 14(-7.4,-1.355) 15(-7,1.355) 16(-7,-1.355) 17(-6.6,1.355) 18(-6.6,-1.355) 19(-6.2,1.355) 20(-6.2,-1.355) 21(-5.8,1.355) 22(-5.8,-1.355) 23(-5.4,1.355) 24(-5.4,-1.355) 25(-5,1.355) 26(-5,-1.355) 27(-4.6,1.355) 28(-4.6,-1.355) 29(-4.2,1.355) 30(-4.2,-1.355) 31(-3.8,1.355) 32(-3.8,-1.355) 33(-3.4,1.355) 34(-3.4,-1.355) 35(-3,1.355) 36(-3,-1.355) 37(-2.6,1.355) 38(-2.6,-1.355) 39(-2.2,1.355) 40(-2.2,-1.355) 41(-1.8,1.355) 42(-1.8,-1.355) 43(-1.4,1.355) 44(-1.4,-1.355) 45(-1,1.355) 46(-1,-1.355) 47(-0.6,1.355) 48(-0.6,-1.355) 49(-0.2,1.355) 50(-0.2,-1.355) 51(0.2,1.355) 52(0.2,-1.355) 53(0.6,1.355) 54(0.6,-1.355) 55(1,1.355) 56(1,-1.355) 57(1.4,1.355) 58(1.4,-1.355) 59(1.8,1.355) 60(1.8,-1.355) 61(2.2,1.355) 62(2.2,-1.355) 63(2.6,1.355) 64(2.6,-1.355) 65(3,1.355) 66(3,-1.355) 67(3.4,1.355) 68(3.4,-1.355) 69(3.8,1.355) 70(3.8,-1.355) 71(4.2,1.355) 72(4.2,-1.355) 73(4.6,1.355) 74(4.6,-1.355) 75(5,1.355) 76(5,-1.355) 77(5.4,1.355) 78(5.4,-1.355) 79(5.8,1.355) 80(5.8,-1.355) 81(6.2,1.355) 82(6.2,-1.355) 83(6.6,1.355) 84(6.6,-1.355) 85(7,1.355) 86(7,-1.355) 87(7.4,1.355) 88(7.4,-1.355) 89(7.8,1.355) 90(7.8,-1.355) 91(8.2,1.355) 92(8.2,-1.355) 93(8.6,1.355) 94(8.6,-1.355) 95(9,1.355) 96(9,-1.355) 97(9.4,1.355) 98(9.4,-1.355) 99(9.8,1.355) 100(9.8,-1.355)
  rect 0.35x0.66 smd mask+0.1: 101(-10.275,1.355) 102(-10.275,-1.355) 103(10.275,1.355) 104(10.275,-1.355)
  silkscreen extent -11.81,-1.02 11.81,1.02, body extent -11.8,-1.02 11.8,1.02, height 1.29
con_hrs_U_FL-SMT [mm] "con_hrs_U_FL-SMT"
  rect 1x1.05 smd mask+0.1: 1(0,0.763)
  rect 1.05x2.2 smd mask+0.1: 2(-1.475,-0.762) 3(1.475,-0.762)
  Layer 1 keep-out region: 0.949,-1.862 0.949,0.233 -0.949,0.237 -0.946,-1.862 0.949,-1.862
  silkscreen extent -1.3,-2.16 1.3,1.41, body extent -1.3,-2.05 1.3,0.52, height 1.25
IND-0603_32H [mm] "Chip Inductor, 2-Leads, Body 1.60x0.80mm, IPC Medium Density"
  rect 0.55x1 smd: 1(-0.625,0) 2(0.625,0)
  body extent -0.9,-0.5 0.9,0.5, height 1
IND_0402-36_LQP15M [mm] "Chip Inductor, 2-Leads, Body 1.00x0.50mm, IPC Medium Density"
  rect 0.63x0.64 smd: 1(-0.465,0) 2(0.465,0)
  body extent -0.55,-0.3 0.55,0.3, height 0.45
LATC-csBGA-132 [mm] "BGA, 132-Balls, Body 8x8mm, Pitch 0.5mm"
  round 0.25 smd: A1(-3.25,3.25) A2(-2.75,3.25) A3(-2.25,3.25) A4(-1.75,3.25) A5(-1.25,3.25) A6(-0.75,3.25) A7(-0.25,3.25) A8(0.25,3.25) A9(0.75,3.25) A10(1.25,3.25) A11(1.75,3.25) A12(2.25,3.25) A13(2.75,3.25) A14(3.25,3.25) B1(-3.25,2.75) B14(3.25,2.75) C1(-3.25,2.25) C3(-2.25,2.25) C4(-1.75,2.25) C5(-1.25,2.25) C6(-0.75,2.25) C7(-0.25,2.25) C8(0.25,2.25) C9(0.75,2.25) C10(1.25,2.25) C11(1.75,2.25) C12(2.25,2.25) C14(3.25,2.25) D1(-3.25,1.75) D3(-2.25,1.75) D4(-1.75,1.75) D5(-1.25,1.75) D6(-0.75,1.75) D7(-0.25,1.75) D8(0.25,1.75) D9(0.75,1.75) D10(1.25,1.75) D11(1.75,1.75) D12(2.25,1.75) D14(3.25,1.75) E1(-3.25,1.25) E3(-2.25,1.25) E4(-1.75,1.25) E11(1.75,1.25) E12(2.25,1.25) E14(3.25,1.25) F1(-3.25,0.75) F3(-2.25,0.75) F4(-1.75,0.75) F6(-0.75,0.75) F7(-0.25,0.75) F8(0.25,0.75) F9(0.75,0.75) F11(1.75,0.75) F12(2.25,0.75) F14(3.25,0.75) G1(-3.25,0.25) G3(-2.25,0.25) G4(-1.75,0.25) G6(-0.75,0.25) G7(-0.25,0.25) G8(0.25,0.25) G9(0.75,0.25) G11(1.75,0.25) G12(2.25,0.25) G14(3.25,0.25) H1(-3.25,-0.25) H3(-2.25,-0.25) H4(-1.75,-0.25) H6(-0.75,-0.25) H7(-0.25,-0.25) H8(0.25,-0.25) H9(0.75,-0.25) H11(1.75,-0.25) H12(2.25,-0.25) H14(3.25,-0.25) J1(-3.25,-0.75) J3(-2.25,-0.75) J4(-1.75,-0.75) J6(-0.75,-0.75) J7(-0.25,-0.75) J8(0.25,-0.75) J9(0.75,-0.75) J11(1.75,-0.75) J12(2.25,-0.75) J14(3.25,-0.75) K1(-3.25,-1.25) K3(-2.25,-1.25) K4(-1.75,-1.25) K11(1.75,-1.25) K12(2.25,-1.25) K14(3.25,-1.25) L1(-3.25,-1.75) L3(-2.25,-1.75) L4(-1.75,-1.75) L5(-1.25,-1.75) L6(-0.75,-1.75) L7(-0.25,-1.75) L8(0.25,-1.75) L9(0.75,-1.75) L10(1.25,-1.75) L11(1.75,-1.75) L12(2.25,-1.75) L14(3.25,-1.75) M1(-3.25,-2.25) M3(-2.25,-2.25) M4(-1.75,-2.25) M5(-1.25,-2.25) M6(-0.75,-2.25) M7(-0.25,-2.25) M8(0.25,-2.25) M9(0.75,-2.25) M10(1.25,-2.25) M11(1.75,-2.25) M12(2.25,-2.25) M14(3.25,-2.25) N1(-3.25,-2.75) N14(3.25,-2.75) P1(-3.25,-3.25) P2(-2.75,-3.25) P3(-2.25,-3.25) P4(-1.75,-3.25) P5(-1.25,-3.25) P6(-0.75,-3.25) P7(-0.25,-3.25) P8(0.25,-3.25) P9(0.75,-3.25) P10(1.25,-3.25) P11(1.75,-3.25) P12(2.25,-3.25) P13(2.75,-3.25) P14(3.25,-3.25)
  silkscreen extent -4.77,-4 4,4, body extent -4,-4 4,4, height 1
MTGC300H130P [mm] "1.3mm hole w/ 3.00mm Annular Ring"
  round 3 / inner round 0 / far side round 3 hole 1.3 paste-10 mask+0.1: 1(0,0)
qfn16_ep5357lui [mm] "DC/DC CONVERTER 0.6-5.2V 3W"
  oval 0.6x0.2 smd mask+0.05: 1(-1.05,1) 2(-1.05,0.6) 3(-1.05,0.2) 4(-1.05,-0.2) 5(-1.05,-0.6) 6(-1.05,-1) 9(1.05,-1) 10(1.05,-0.6) 11(1.05,-0.2) 12(1.05,0.2) 13(1.05,0.6) 14(1.05,1)
  oval 0.2x0.6 smd mask+0.05: 7(-0.2,-1.175) 8(0.2,-1.175) 15(0.2,1.175) 16(-0.2,1.175)
  silkscreen extent -1.65,-1.4 1.14,1.52, body extent -1.17,-1.3 1.17,1.3, height 1.2
QFN24_mpu-6500_3x3 [mm] "QFN24_MPU-6500_3X3"
  oval 0.6x0.2 smd mask+0.05: 1(-1.5,1) 2(-1.5,0.6) 3(-1.5,0.2) 4(-1.5,-0.2) 5(-1.5,-0.6) 6(-1.5,-1) 13(1.5,-1) 14(1.5,-0.6) 15(1.5,-0.2) 16(1.5,0.2) 17(1.5,0.6) 18(1.5,1)
  oval 0.2x0.6 smd mask+0.05: 7(-1,-1.5) 8(-0.6,-1.5) 9(-0.2,-1.5) 10(0.2,-1.5) 11(0.6,-1.5) 12(1,-1.5) 19(1,1.5) 20(0.6,1.5) 21(0.2,1.5) 22(-0.2,1.5) 23(-0.6,1.5) 24(-1,1.5)
  Layer 1 keep-out region: -1,-1 1,-1 1,1 -1,1
  silkscreen extent -2.43,-1.65 1.65,1.65, body extent -1.5,-1.5 1.5,1.5, height 0.95
QFN48_6X6MM_NO_VIAS [mm] "QFN, 48-Leads, Body 6.00x6.00mm, Pitch 0.40mm, Thermal Pad 4.60x4.60mm, IPC Medium Density"
  rect 0.85x0.2 smd mask+0.1: 1(-2.9,2.2) 2(-2.9,1.8) 3(-2.9,1.4) 4(-2.9,1) 5(-2.9,0.6) 6(-2.9,0.2) 7(-2.9,-0.2) 8(-2.9,-0.6) 9(-2.9,-1) 10(-2.9,-1.4) 11(-2.9,-1.8) 12(-2.9,-2.2) 25(2.9,-2.2) 26(2.9,-1.8) 27(2.9,-1.4) 28(2.9,-1) 29(2.9,-0.6) 30(2.9,-0.2) 31(2.9,0.2) 32(2.9,0.6) 33(2.9,1) 34(2.9,1.4) 35(2.9,1.8) 36(2.9,2.2)
  rect 0.2x0.85 smd mask+0.1: 13(-2.2,-2.9) 14(-1.8,-2.9) 15(-1.4,-2.9) 16(-1,-2.9) 17(-0.6,-2.9) 18(-0.2,-2.9) 19(0.2,-2.9) 20(0.6,-2.9) 21(1,-2.9) 22(1.4,-2.9) 23(1.8,-2.9) 24(2.2,-2.9) 37(2.2,2.9) 38(1.8,2.9) 39(1.4,2.9) 40(1,2.9) 41(0.6,2.9) 42(0.2,2.9) 43(-0.2,2.9) 44(-0.6,2.9) 45(-1,2.9) 46(-1.4,2.9) 47(-1.8,2.9) 48(-2.2,2.9)
  rect 4.6x4.6 smd mask+0.1: 49(0,0)
  silkscreen extent -3.92,-3.15 3.15,3.15, body extent -3,-3 3,3, height 0.9
qfn64_atsamg55j19a_no_vias [mm] "IC MCU 32BIT 512KB FLASH QFN64"
  rect 0.8x0.2 smd mask+0.1: 1(-3.675,3) 2(-3.675,2.6) 3(-3.675,2.2) 4(-3.675,1.8) 5(-3.675,1.4) 6(-3.675,1) 7(-3.675,0.6) 8(-3.675,0.2) 9(-3.675,-0.2) 10(-3.675,-0.6) 11(-3.675,-1) 12(-3.675,-1.4) 13(-3.675,-1.8) 14(-3.675,-2.2) 15(-3.675,-2.6) 16(-3.675,-3) 33(3.675,-3) 34(3.675,-2.6) 35(3.675,-2.2) 36(3.675,-1.8) 37(3.675,-1.4) 38(3.675,-1) 39(3.675,-0.6) 40(3.675,-0.2) 41(3.675,0.2) 42(3.675,0.6) 43(3.675,1) 44(3.675,1.4) 45(3.675,1.8) 46(3.675,2.2) 47(3.675,2.6) 48(3.675,3)
  rect 0.2x0.8 smd mask+0.1: 17(-3,-3.675) 18(-2.6,-3.675) 19(-2.2,-3.675) 20(-1.8,-3.675) 21(-1.4,-3.675) 22(-1,-3.675) 23(-0.6,-3.675) 24(-0.2,-3.675) 25(0.2,-3.675) 26(0.6,-3.675) 27(1,-3.675) 28(1.4,-3.675) 29(1.8,-3.675) 30(2.2,-3.675) 31(2.6,-3.675) 32(3,-3.675) 49(3,3.675) 50(2.6,3.675) 51(2.2,3.675) 52(1.8,3.675) 53(1.4,3.675) 54(1,3.675) 55(0.6,3.675) 56(0.2,3.675) 57(-0.2,3.675) 58(-0.6,3.675) 59(-1,3.675) 60(-1.4,3.675) 61(-1.8,3.675) 62(-2.2,3.675) 63(-2.6,3.675) 64(-3,3.675)
  rect 6.2x6.2 smd paste-6.2 mask+0.1: 65(0,0)
  silkscreen extent -4.32,-3.9 3.9,3.9, body extent -3.75,-3.75 3.75,3.75, height 0.9
SOD523 [mm] "DIODE SCHOTTKY 30V 200MA SOD523"
  rect 0.48x0.4 smd mask+0.05: A(-0.66,0) C(0.66,0)
  silkscreen extent -0.6,-0.5 0.6,0.5, body extent -0.6,-0.4 0.7,0.4, height 0.7
son4_tlv707dqn [mm] "IC REG LDO 3.3V 0.2A 4X2SON"
  round 0.15 smd paste-5 mask-5: 1(0.33,0.5) 2(-0.33,0.5) 3(-0.34,-0.48) 4(0.34,-0.47)
  rect 0.58x0.58 smd rot 45 paste-0.065 mask-0.05: 5(0,0)
  Layer 1 region: 0.48,-0.66 0.48,-0.2 0.37,-0.2 0.17,-0.4 0.17,-0.66
  Layer 1 region: -0.48,-0.66 -0.48,-0.2 -0.37,-0.2 -0.17,-0.4 -0.17,-0.66
  Layer 1 region: 0.48,0.66 0.48,0.2 0.37,0.2 0.17,0.4 0.17,0.66
  Layer 1 region: -0.48,0.66 -0.48,0.2 -0.37,0.2 -0.17,0.4 -0.17,0.66
  silkscreen extent -0.64,-0.77 0.64,0.9, body extent -0.53,-0.53 0.53,0.53, height 0.4
STDFN8_SLG59M1599V [mm] "STDFN8_SLG59M1599V"
  rect 0.8x0.19 smd: 1(-0.5,0.6) 2(-0.5,0.2) 3(-0.5,-0.2) 4(-0.5,-0.6) 5(0.5,-0.6) 6(0.5,-0.2) 7(0.5,0.2) 8(0.5,0.6)
  silkscreen extent -0.77,0.9 -0.68,1, body extent -0.53,-0.82 0.53,0.82, height 0.6
TP-S100_SMT [mm] "TP-S100_SMT"
  round 1 smd paste-0.5: 1(0,0)
  body extent -0.5,-0.5 0.5,0.5, height 0.01
Xtal_abm12 [mm] "xtal_abm12"
  rect 0.6x0.5 smd mask+0.1: 1(-0.55,-0.4) 2(0.55,-0.4) 3(0.55,0.4) 4(-0.55,0.4)
  silkscreen extent -1.17,-1.17 1.14,0.89, body extent -0.85,-0.65 0.85,0.65, height 0.45
xtal_abs06 [mm] "Crystal 32.7680kHz 10ppm 9pF 90 kOhm -40°C - 85°C Surface Mount 2-SMD"
  rect 0.75x1.4 smd: 1(-0.725,0) 2(0.725,0)
  silkscreen extent 0,-0.55 0,0.55, body extent -1,-0.6 1,0.6, height 0.6
XTAL_SiT1602_250x200x80 [mm] "OSC MEMS 48.000MHZ H/LV-CMOS SMD"
  rect 1.1x1 smd: 1(-0.95,-0.75) 2(0.95,-0.75) 3(0.95,0.75) 4(-0.95,0.75)
  silkscreen extent -1.58,-1.84 -1.41,-1.66, body extent -1.25,-1 1.25,1, height 0.8

## Part data
C1 C12 C17 C21 C77 C81 C91: library part GRM155R60J475ME47D, "CAP CER 4.7UF 6.3V 20% X5R 0402"
C2 C3 C4 C5 C6 C7 C8 C9 C10 C11 C13 C14 C15 C16 C18 C20 C41 C42 C45 C52 C74 C75 C76 C78 C79 C80 C82 C83 C84 C85 C86 C87 C92 C93 C94 C95 C96 C116 C117: library part CL03A104KP3NNNC, "CAP CER 0.1UF 10V 10% X5R 0201"
C19 C38 C39 C46 C47 C48 C49 C51: library part CL10A106MA8NRNC, "CAP CER 10UF 25V 20% X5R 0603"
C37 C40 C50: library part GRM21BR60J476ME15L, "CAP CER 47UF 6.3V X5R 0805"
C57: library part GJM0335C1E1R2BB01D, "Multilayer Ceramic Capacitors MLCC - SMD/SMT 0201 1.2pF 25Volts C0G +/-0.1pF"
C88 C89: library part GRM0335C1E150JA01D, "CAP CER 15PF 25V C0G 0201"
C90: library part CL05A105KO5NNNC, "CAP CER 1UF 16V X5R 0402"
C97: library part GRM0335C1E101JA01D, "CAP CER 100PF 25V 5% NP0 0201"
C98: library part GJM0335C1ER80BB01D, "0.80pF ±0.1pF 25V C0G, NP0 Ceramic Capacitor -55°C ~ 125°C Surface Mount, MLCC 0201 (0603 Metric) 0.024\" L x 0.012\" W (0.60mm x 0.30mm)"
C99: library part C0603C0G1E0R8W030BF, "CAP CER 0.8PF 25V NP0 0201"
C102 C103: library part GRM0335C1E120GA01D, "12pF 25V Ceramic Capacitor C0G, NP0 0201"
D1: "DIODE SCHOTTKY 30V 200MA SOD523"
J1: "CONN HDR 100POS 0.4MM SMD GOLD"
J2: "CONN HDR 80POS 0.4MM SMD GOLD"
J3: library part U.FL-R-SMT(10), "CONN RECPT ULTRA-MINI COAX SMD"
L3: library part LQP15MN15NG02D, "IND, 15 nH, 2%, 0402"
L4: library part CBMF1608T100K, "INDUCTOR 10UH 115MA 0603"
L5: library part LQP03TN3N9B02D, "FIXED IND 3.9NH 400MA 300 MOHM 0201"
L127: library part LQP03TN1N8B02D, "FIXED IND 1.8NH 600MA 150 MOHM"
M1 M2: "MTG, 3.00 mm Pad, 1.30 mm throughhole, PLATED"
R1 R2 R3 R4 R5 R9 R11 R12 R15 R109 R110 R112 R122 R126: library part RC0201FR-0710KL, "RES 10K OHM 1/20W 1% 0201 SMD"
R6 R7: library part ERJ-1GEF37R4C, "RES 37.4 OHM 1% 0201 SMD"
R8 R14: library part ERJ-1GE0R00C, "RES SMD 0.0OHM JUMPER 1/20W 0201"
R10 R111 R113 R114 R115 R116 R117 R120 R125 R128 R129 R130 R164: library part RC0201FR-0733R, "RES 33 OHM 1/20W 1% 0201 SMD"
R13: library part ERJ-1GEF1001C, "RES 1.00K OHM 1/20W 1% 0201 SMD"
R16: library part RC0201FR-07100RL, "RES 100 OHM 1/20W 1% 0201 SMD"
R41 R42 R43 R44: library part ERJ-1GEF1782C, "RES SMD 17.8K OHM 1% 1/20W 0201"
R53 R54: library part ERJ-1GEF4701C, "RES 4.70K OHM 1/20W 1% 0201 SMD"
R118: library part ERJ-1GEF2702C, "RES 27K OHM 1/20W 1% 0201 SMD"
R119: library part RC0201JR-0747KL, "RES 47K OHM 1/20W 5% 0201 SMD"
TP1 TP2 TP3 TP4 TP5 TP6 TP7 TP8 TP9 TP10 TP11 TP12 TP13 TP14 TP15 TP16: library part TP0042, "TESTPOINT, 1MM SMD, Square pad, Round SM opening"
U1: "IC FPGA 95 I/O 132CBGA"
U2 U3: "Dual 40mohm 1A Load Switch"
U4: "DC/DC CONVERTER 0.6-5.2V 3W"
U6 U13: "IC REG LDO 3.3V 0.2A 4X2SON"
U23: "6-axis Gyroscope/Accelerometer"
U24: "IC MCU 32BIT 512KB FLASH 64VQFN"
U25: library part nRF52832-QFAA, "IC SOC 2.4GHZ 512K FLASH QFN"
Y1: "CRYSTAL 32.768 KHZ 9PF SMD"
Y2: library part ABM12-32.000MHZ-B2X-T3, "Crystal 32.0000MHz 20ppm 8pF 100 Ohm -20°C - 70°C Surface Mount 4-SMD, No Lead (DFN, LCC)"
Y3: library part SIT1602AI-12-33E-48.000000G, "OSC MEMS 48.000MHZ H/LV-CMOS SMD"

## Via types
v1: diameter 0.4, hole 0.2, Layer 1 to Layer 6, tented both sides, 358 vias
v2: diameter 0.381, hole 0.279, Layer 4 to Layer 6, tented bottom, 80 vias

## Nets (pads, with @x,y where several pads share a name; then routed paths per layer and width w, separated by ;. In a path a pad name is that pad's centre, name@x,y a point inside that pad or via, vN(x,y) a via of type N, cw(c..) or ccw(c..) an arc to the next point about the centre after c; other vN are vias at no path point)
ANT: C98.1 L5.1 U25.30 | length 1.7
  Layer 1 w0.2: U25.30@5.7,-6.1 5.7,-5.55 5.8,-5.45
  Layer 1 w0.279: 5.8,-5.45 C98.1@5.8,-5.1 L5.1@5.8,-4.4
BATCHG_INT: J2.63 U24.62 | length 18.5
  Layer 1 w0.1: v1(16,-4.1) 16.2,-4.3 U24.62@16.2,-4.9
  Layer 4 w0.1: v2(15.9,-15.1) 15.9,-15.075 16.25,-14.725 17.375,-14.725 18.4,-13.7 18.4,-12.775 18.1,-12.475 17.255,-12.475 17.25,-12.48 16.155,-12.48 15.1,-11.425 15.1,-10.32 13.7,-8.92 13.7,-8.61 15.31,-7 15.31,-5.67 15.61,-5.37 15.61,-4.49 v1(16,-4.1)
  Layer 6 w0.1: v2(15.9,-15.1) 16.05,-14.95 16.05,-14.405 J2.63@16.1,-14.355
FLEX_A_MISO: J2.51 U24.47 | length 20.3
  Layer 1 w0.1: U24.47@22.075,-5.975 22.55,-5.975 22.7,-5.825 22.7,-4.9 v1(22.4,-4.6)
  Layer 3 w0.1: v1(14.6,-12.85) 14.6,-12.775 15.075,-12.3 20.675,-12.3 22.55,-10.425 22.925,-10.425 23.15,-10.2 23.15,-9.83 22.945,-9.625 22.7,-9.625 21.75,-8.675 21.75,-6.05 22.475,-5.325 22.475,-4.95 22.4,-4.875 v1(22.4,-4.6)
  Layer 6 w0.1: J2.51@13.7,-14.355 13.7,-13.95 14.15,-13.5 14.15,-13.275 14.562,-12.863 14.55,-12.85 v1(14.6,-12.85)
FLEX_A_MOSI: J2.53 R120.1 | length 21.2
  Layer 1 w0.1: R120.1@21.3,-3.1 v1(21.3,-2.6)
  Layer 4 w0.1: v2@14.585,-13.36 15.01,-12.935 15.01,-12.16 14.48,-11.63 14.48,-10.28 13.7,-9.5 13.7,-9.203 13.5,-9.003 13.5,-8.42 14.64,-7.28 14.64,-5.81 15.17,-5.28 15.17,-4.43 15.9,-3.7 17.5,-3.7 18.6,-4.8 20.975,-4.8 21.55,-4.225 21.55,-2.85 v1(21.3,-2.6)
  Layer 6 w0.1: J2.53@14.1,-14.355 14.1,-13.925 14.575,-13.45 v2(14.575,-13.35)
FLEX_A_SCLK: J2.55 R113.1 | length 13.5
  Layer 1 w0.1: R113.1@23.9,-9.575 24,-9.675 24.1,-9.575 v1(24.55,-9.575)
  Layer 6 w0.1: J2.55@14.5,-14.355 14.5,-13.925 15.075,-13.35 19.875,-13.35 20.45,-12.775 22.22,-12.775 23.625,-11.37 23.625,-10.525 24.55,-9.6 v1(24.55,-9.575)
FLEX_B_MISO: J2.74 U24.39 | length 7.9
  Layer 1 w0.1: U24.39@22.075,-9.175 v1(22.8,-9.175)
  Layer 6 w0.1: J2.74@18.1,-11.645 18.1,-11.1 18,-11 18,-9.4 18.225,-9.175 v1(22.8,-9.175)
FLEX_B_MOSI: J2.76 R114.1 | length 8.4
  Layer 1 w0.1: R114.1@23.9,-8.775 23.925,-8.8 v1(24.55,-8.8)
  Layer 6 w0.1: J2.76@18.5,-11.645 18.5,-11.1 18.925,-10.675 18.925,-10.4 19.225,-10.1 21.175,-10.1 21.7,-9.575 23.775,-9.575 v1(24.55,-8.8)
FLEX_B_SCLK: J2.72 R125.2 | length 13
  Layer 1 w0.1: R125.2@20.6,-3.2 R125.2@20.6,-3.1 20.8,-2.9 v1(20.8,-2.6)
  Layer 6 w0.1: J2.72@17.7,-11.645 17.7,-11.1 17.8,-11 17.8,-8.5 18.2,-8.1 20.7,-8.1 21.1,-7.7 21.1,-5.025 21.4,-4.725 21.4,-3.6 20.8,-3 v1(20.8,-2.6)
FLEX_C_MISO: J2.30 R128.1 R164.1 U24.4 | length 32.2
  Layer 1 w0.1: v1(9.675,-9.35) 9.925,-9.1 R128.1@10.2,-9.1 10.2,-8 11.6,-6.6 12.375,-6.6 12.825,-7.05 13.95,-7.05 14.225,-6.775 U24.4@14.725,-6.775 ; R164.1@18.075,2.2 18.35,2.475 19.025,2.475 v1(19.4,2.1)
  Layer 3 w0.1: v1(8.7,-12.575) 8.7,-10.325 v1(9.675,-9.35) 10.25,-8.775 12.515,-8.775 15.44,-5.85 17.925,-5.85 19.2,-4.575 19.2,-2.95 18.775,-2.525 18.775,1.2 19.4,1.825 v1(19.4,2.1)
  Layer 6 w0.1: v1(8.7,-12.575) 8.775,-12.575 9.3,-12.05 J2.30@9.3,-11.645
FLEX_C_MOSI: J2.28 R111.2 U23.24 U25.15 | length 25.8
  Layer 1 w0.1: U25.15@8.4,-10.4 8.9,-10.4 9.125,-10.175 v1(9.575,-10.175) 10.375,-10.175 10.4,-10.2 10.7,-9.9 10.7,-7.9 11.8,-6.8 12.225,-6.8 12.85,-7.425 13.075,-7.425 R111.2@13.1,-7.45 ; U23.24@18.825,-2.2 v1(19.325,-2.2)
  Layer 3 w0.1: v1(9.575,-10.175) 9.575,-10.15 10.6,-9.125 14.8,-9.125 15.87,-8.055 15.87,-6.455 16.225,-6.1 17.975,-6.1 19.55,-4.525 19.55,-2.75 19.325,-2.525 v1(19.325,-2.2)
  Layer 6 w0.1: J2.28@8.9,-11.645 8.9,-11.2 8.85,-11.15 8.85,-10.625 9.3,-10.175 v1(9.575,-10.175)
FLEX_C_SCLK: J2.26 R117.1 U23.23 U25.17 | length 19.2
  Layer 1 w0.1: U25.17@8.4,-9.6 8.925,-9.6 9.225,-9.3 v1@9.225,-9.05 ; R117.1@17.975,-3.325 17.975,-3.25 v1(18.425,-2.8) U23.23@18.425,-2.2
  Layer 3 w0.1: v1(9.25,-9.05) 12.76,-5.54 16.16,-5.54 16.625,-5.075 18.4,-5.075 18.875,-4.6 18.875,-3.25 v1(18.425,-2.8)
  Layer 6 w0.1: J2.26@8.5,-11.645 8.5,-9.8 9.312,-8.988 9.25,-8.926 v1(9.25,-9.05)
FPGA_CDONE: R13.2 R14.2 TP5.1 U1.M10 U24.56 | length 12.9
  Layer 1 w0.1: TP5.1@13.5,-3.6 13.55,-3.65 13.55,-4.375 13.6,-4.325 13.674,-4.399 v1(13.525,-4.399) ; v1(18.525,-4.15) 18.525,-4.375 18.6,-4.45 U24.56@18.6,-4.9
  Layer 3 w0.1: v1(13.525,-4.399) 14.126,-4.399 14.3,-4.225 15.15,-4.225 15.625,-3.75 15.9,-3.75 16.15,-3.5 17.875,-3.5 v1(18.525,-4.15)
  Layer 6 w0.083: U1.M10@14,-0.125 13.75,-0.375 13.75,-0.728 13.897,-0.875 14.102,-0.875 14.25,-1.022 14.25,-2.475 14.15,-2.575 14.15,-3.3 R13.2@14.1,-3.3
  Layer 6 w0.1: v1(13.525,-4.399) 13.5,-4.374 13.5,-4 R14.2@13.4,-3.9 13.65,-3.9 13.75,-3.8 13.75,-3.45 13.85,-3.35 14.05,-3.35 R13.2@14.1,-3.3
FPGA_CRESET: C18.1 R15.2 TP6.1 U1.L10 U24.34 | length 24.1
  Layer 1 w0.1: U24.34@22.075,-11.175 22.575,-11.175 v1(22.8,-11.4) 22.8,-11.7 TP6.1@23.4,-12.3 23.4,-12.425 23.75,-12.775 R15.2@23.75,-13.2 C18.1@24.3,-13.2
  Layer 4 w0.1: v2(20.325,-0.35) 20.35,-0.35 22.75,-2.75 22.75,-4.1 24.25,-5.6 24.25,-6.65 23.3,-7.6 23.3,-10.9 v1(22.8,-11.4)
  Layer 6 w0.083: U1.L10@13.5,-0.125 13.75,0.125 14.5,0.125 14.725,-0.1 14.725,-0.25 14.85,-0.375 20.3,-0.375 v2(20.325,-0.35)
FPGA_DATA_RDY: U1.N14 U24.60 | length 4.7
  Layer 1 w0.1: v1(16.775,-4.1) 17,-4.325 U24.60@17,-4.9
  Layer 6 w0.083: U1.N14@14.5,-2.125 14.75,-1.875 15.2,-1.875 15.425,-2.1 15.425,-2.725 15.6,-2.9
  Layer 6 w0.1: 15.6,-2.9 15.795,-2.9 16.05,-3.155 16.05,-3.375 v1(16.775,-4.1)
FPGA_GPIO_1: J2.34 U1.B14 | length 10.3
  Layer 6 w0.1: U1.B14@9,-2.125 9,-4 9.475,-4.475 9.475,-5.175 10.45,-6.15 10.45,-7.875 10.075,-8.25 10.075,-11.62 J2.34@10.1,-11.645
FPGA_GPIO_2: J2.36 U1.D12 | length 11.7
  Layer 6 w0.083: 9.25,-2.9 9.25,-1.875 U1.D12@10,-1.125
  Layer 6 w0.1: 9.25,-2.9 9.25,-3.925 9.725,-4.4 9.725,-5.1 10.7,-6.075 10.7,-7.95 10.3,-8.35 10.3,-11.175 10.5,-11.375 J2.36@10.5,-11.645
FPGA_GPIO_3: J2.38 U1.C14 | length 10.5
  Layer 6 w0.1: U1.C14@9.5,-2.125 9.5,-3.85 9.975,-4.325 9.975,-5.025 10.95,-6 10.95,-7.983 10.5,-8.433 10.5,-10.988 10.9,-11.388 J2.38@10.9,-11.645
FPGA_GPIO_4: J2.40 U1.E12 | length 11.8
  Layer 6 w0.083: 9.75,-2.925 9.75,-1.875 U1.E12@10.5,-1.125
  Layer 6 w0.1: 9.75,-2.925 9.75,-3.775 10.25,-4.275 10.25,-4.95 11.15,-5.85 11.15,-8.375 10.85,-8.675 10.85,-10.35 11,-10.5 11.15,-10.5 11.3,-10.65 J2.40@11.3,-11.645
FPGA_GPIO_5: J2.42 U1.D14 | length 10.2
  Layer 6 w0.1: U1.D14@10,-2.125 10,-3.725 10.525,-4.25 10.525,-4.85 11.4,-5.725 11.4,-8.95 11.7,-9.25 J2.42@11.7,-11.645
FPGA_GPIO_6: J2.44 U1.F12 | length 11.6
  Layer 6 w0.083: 10.25,-2.925 10.25,-1.875 U1.F12@11,-1.125
  Layer 6 w0.1: 10.25,-2.925 10.25,-3.65 10.775,-4.175 10.775,-4.75 11.625,-5.6 11.625,-8.742 12.1,-9.217 J2.44@12.1,-11.645
FPGA_GPIO_7: J2.46 U1.E14 | length 10.3
  Layer 6 w0.1: U1.E14@10.5,-2.125 10.5,-3.55 11.05,-4.1 11.05,-4.7 11.95,-5.6 11.95,-6.575 12.4,-7.025 12.4,-11.05 12.5,-11.15 J2.46@12.5,-11.645
FPGA_GPIO_8: J2.48 U1.G12 | length 11.7
  Layer 6 w0.083: 10.75,-2.95 10.75,-1.875 U1.G12@11.5,-1.125
  Layer 6 w0.1: 10.75,-2.95 10.75,-3.45 11.35,-4.05 11.35,-4.625 12.225,-5.5 12.225,-6.45 12.8,-7.025 12.8,-10.975 12.9,-11.075 J2.48@12.9,-11.645
FPGA_GPIO_9: J2.50 U1.F14 | length 10.5
  Layer 6 w0.1: U1.F14@11,-2.125 11,-3.35 11.65,-4 11.65,-4.55 12.5,-5.4 12.5,-6.325 13.15,-6.975 13.15,-10.85 13.3,-11 J2.50@13.3,-11.645
FPGA_GPIO_10: J2.52 U1.K14 | length 10
  Layer 6 w0.1: U1.K14@13,-2.125 13,-4.15 12.725,-4.425 12.725,-6.15 13.5,-6.925 13.5,-10.65 13.7,-10.85 J2.52@13.7,-11.645
FPGA_JTAGEN: J2.10
FPGA_MCLK: U1.G14 Y3.3 | length 12.2
  Layer 1 w0.1: Y3.3@12.906,-12.525 13.006,-12.425 v1(13.775,-12.425)
  Layer 4 w0.1: v2(12.375,-4.75) 12.375,-6.395 12.97,-6.99 12.97,-11.62 v1(13.775,-12.425)
  Layer 6 w0.1: U1.G14@11.5,-2.125 11.5,-3.475 11.95,-3.925 11.95,-4.325 v2(12.375,-4.75)
FPGA_MCU_1: R14.1 U1.L14 | length 1.3
  Layer 6 w0.1: R14.1@13.4,-3.3 13.4,-3 13.3,-2.9 13.3,-2.325 U1.L14@13.5,-2.125
FPGA_MCU_2: U1.P8 U24.52 | length 14.7
  Layer 1 w0.1: v1(15.626,0.85) 15.626,1.801 16.7,2.875 19.525,2.875 20.575,1.825 20.575,0.775 v1(20.2,0.4) ; v1(20.1,-4.105) 20.2,-4.205 U24.52@20.2,-4.9
  Layer 4 w0.1: v1(20.1,-4.105) 20.055,-4.105 19.7,-3.75 19.7,-0.1 v1(20.2,0.4)
  Layer 6 w0.1: U1.P8@15,0.875 15.025,0.85 v1(15.626,0.85)
FPGA_MCU_3: J2.66 U1.P7 U24.50 | length 26.2
  Layer 1 w0.1: v1(16.05,1.625) 16.05,1.925 16.8,2.675 19.425,2.675 20.2,1.9 v1(20.2,1) ; U24.50@21,-4.9 v1(21,-4.2)
  Layer 4 w0.1: v1(20.2,1) 19.6,0.4 19.525,0.325 18.95,-0.25 18.95,-3.65 19.8,-4.5 20.7,-4.5 v1(21,-4.2)
  Layer 6 w0.1: U1.P7@15,1.375 15.25,1.625 v1(16.05,1.625) ; J2.66@16.5,-11.645 16.5,-11.1 16.9,-10.7 16.9,-7.4 17.2,-7.1 19.5,-7.1 19.9,-6.7 19.9,-5.3 v1(21,-4.2)
FPGA_MISO: R10.1 TP1.1 U24.43 | length 13.8
  Layer 1 w0.1: v1(20.9,-1.8) 21.45,-1.8 23.015,-3.365 23.015,-3.915 TP1.1@23.8,-4.7 24.3,-5.2 24.3,-7.175 24.075,-7.4 22.8,-7.4 22.625,-7.575 U24.43@22.075,-7.575
  Layer 6 w0.1: R10.1@16.85,-1.125 19.075,-1.125 19.362,-1.412 20.512,-1.412 v1(20.9,-1.8)
FPGA_MOSI: R115.2 TP2.1 U1.P11 | length 15
  Layer 1 w0.1: v1(20.5,-1) 21.125,-1 23.05,-2.925 23.225,-2.925 TP2.1@23.8,-3.5 24.5,-4.2 24.5,-7.5 24.2,-7.8 R115.2@23.9,-7.8
  Layer 6 w0.1: U1.P11@15,-0.625 17.35,-0.625 17.45,-0.725 19.4,-0.725 19.675,-1 v1(20.5,-1)
FPGA_NCS: R12.1 TP4.1 U1.P13 U24.44 | length 15.1
  Layer 1 w0.1: v1(20.3,-2.4) 20.5,-2.2 21.525,-2.2 22.2,-2.875 TP4.1@22.2,-3.5 ; U24.44@22.075,-7.175 23.95,-7.175 24.1,-7.025 24.1,-6 23.1,-5 23.1,-4.4 TP4.1@22.2,-3.5 ; TP4.1@22.2,-3.525 TP4.1@22.2,-3.5
  Layer 6 w0.1: U1.P13@15,-1.625 15.4,-1.625 15.675,-1.9 R12.1@16.35,-1.9 18.175,-1.9 18.875,-2.6 19.7,-2.6 19.9,-2.4 v1(20.3,-2.4)
FPGA_NRST: R1.1 U1.H1 U24.3 | length 19.1
  Layer 1 w0.1: v1(11.875,4.85) 12.175,5.15 R1.1@12.4,5.15 12.675,5.15 12.925,5.4 13.925,5.4 15.475,3.85 15.475,2.35 14.9,1.775 14.9,0.725 14.675,0.5 14.134,0.5 13.575,-0.059 13.575,-1.675 13.25,-2 13.25,-2.75 12.919,-3.081 12.919,-3.69 12.925,-3.696 12.925,-4.425 12.725,-4.625 12.725,-6.625 12.85,-6.75 13.9,-6.75 14.275,-6.375 U24.3@14.725,-6.375
  Layer 6 w0.1: v1(11.875,4.85) 11.875,4.5 U1.H1@12,4.375
FPGA_SCLK: R116.2 TP3.1 U1.P12 | length 18.3
  Layer 1 w0.1: v1(20.3,-1.8) 20.3,-1.45 20.025,-1.175 20.025,-0.775 20.275,-0.525 21.125,-0.525 22.9,-2.3 TP3.1@23.8,-2.3 24.7,-3.2 24.7,-7.9 24.3,-8.3 R116.2@23.9,-8.3
  Layer 6 w0.1: U1.P12@15,-1.125 15.4,-1.125 15.775,-1.5 18.325,-1.5 18.625,-1.8 v1(20.3,-1.8)
FPGA_SDO: R10.2 U1.M11 | length 2.5
  Layer 6 w0.083: U1.M11@14,-0.625 14.425,-0.625 14.675,-0.875 15.575,-0.875 15.825,-1.125 R10.2@16.25,-1.125
FPGA_TCK: J2.8
FPGA_TDI: J2.4
FPGA_TDO: J2.2
FPGA_TMS: J2.6